# Altium PCB pin board.PcbDoc
Units mil, origin at the board's own origin, x right, y up, seen from the top; angles counter-clockwise.
Board outline 3464.57 x 2362.2 mil, 2 copper layers (Top Layer, Bottom Layer); 67 components, 66 nets, 298 pads, 102 vias.
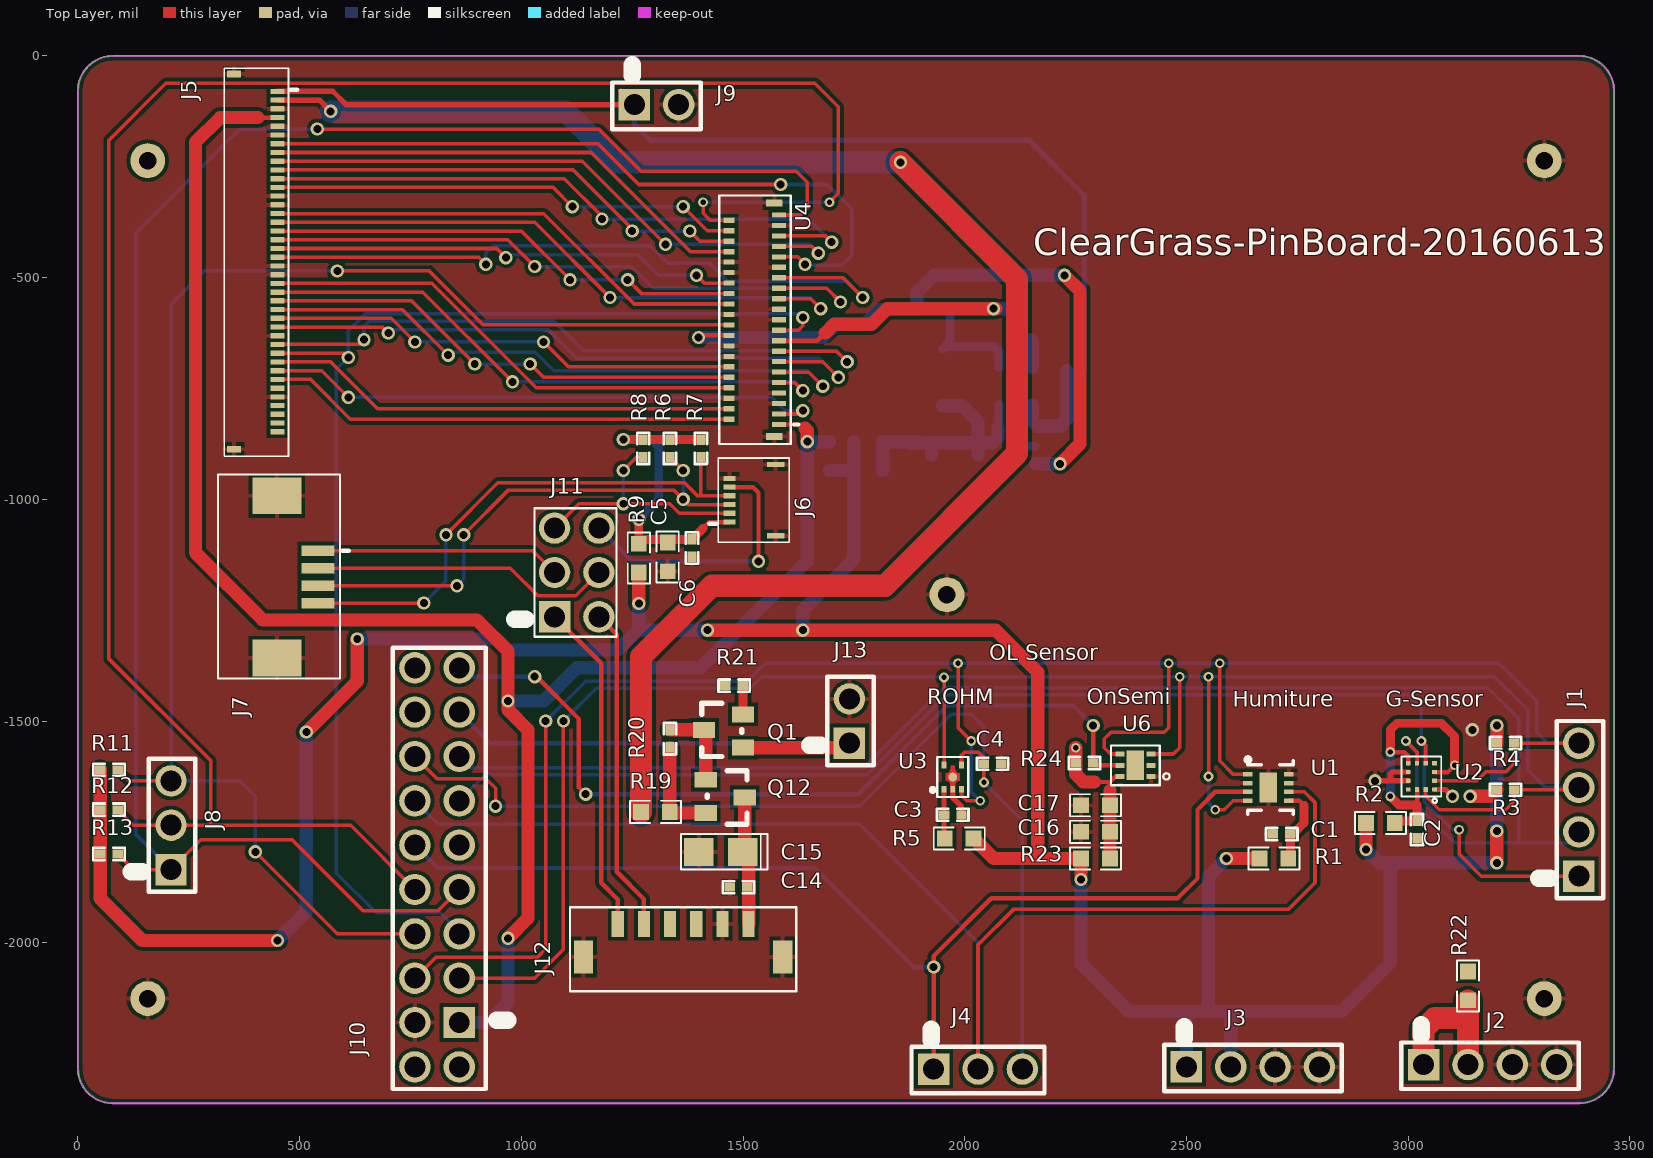
[diagram p0: Top Layer view]
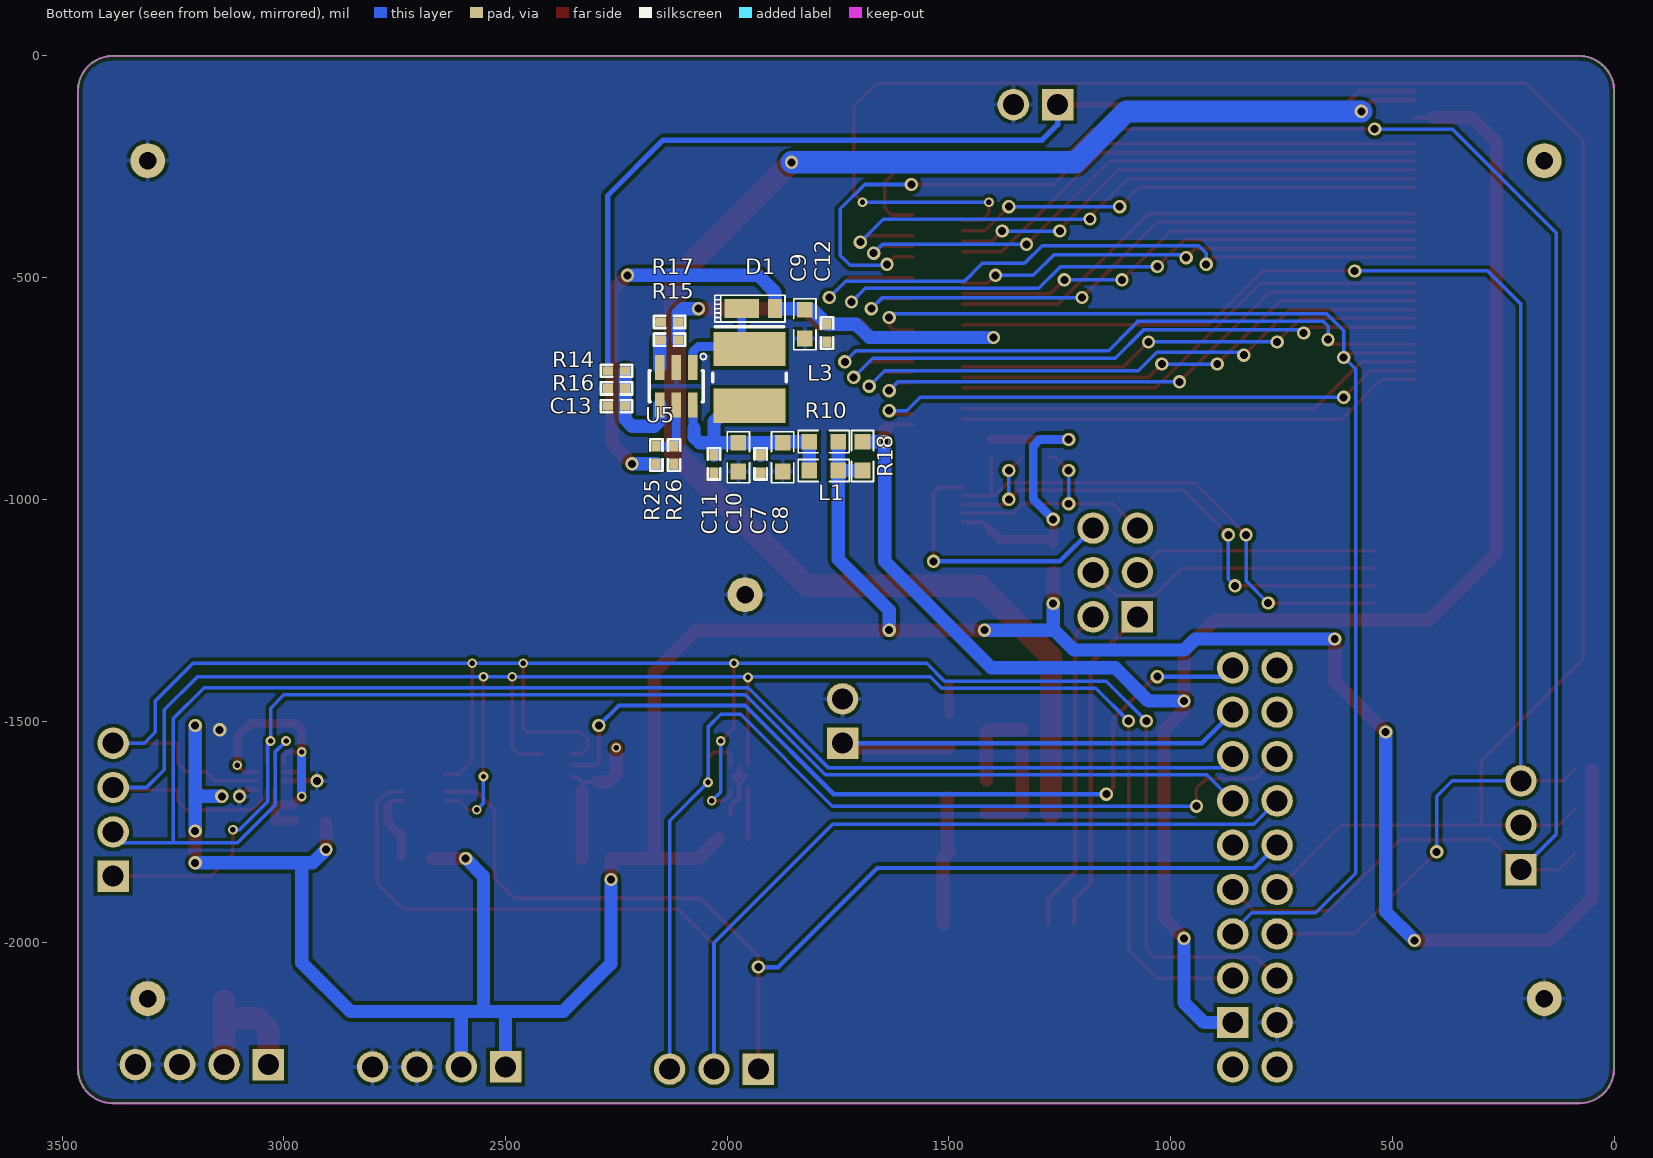
[diagram p1: Bottom Layer view, seen from below]
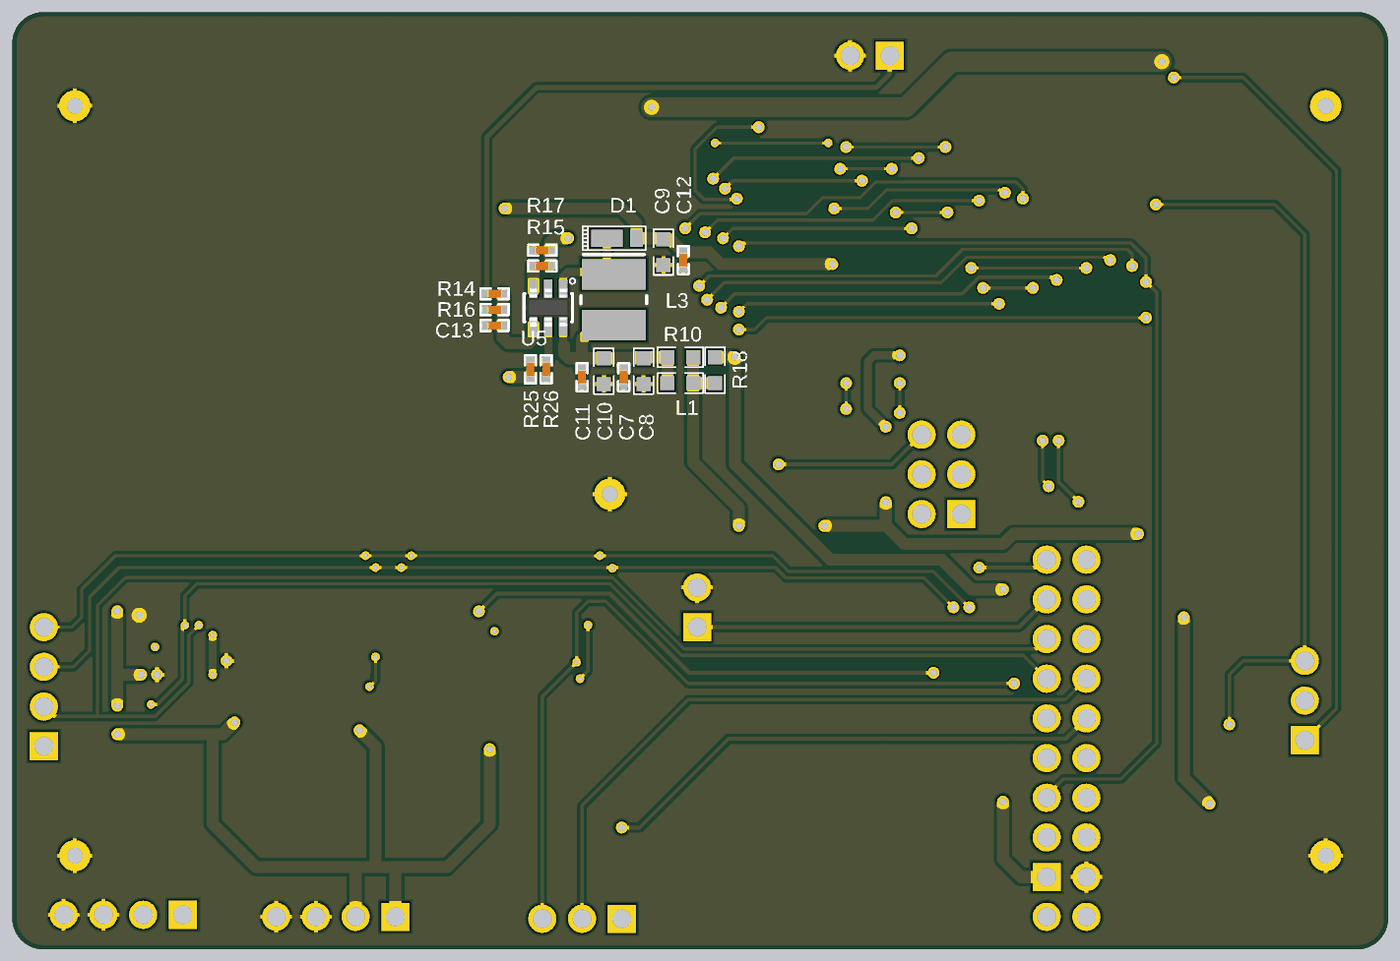
[diagram p2: 3D render of the assembled board from below, using the file's embedded part models]

## Layer stack, top to bottom
Top Layer: signal copper 1.4
Dielectric: dielectric 12.6, FR-4, Dk 4.8
Bottom Layer: signal copper 1.4

## Board outline
78.74,-2362.2 cw(c78.74,-2283.46) 0,-2283.46 0,-78.74 cw(c78.74,-78.74) 78.74,0 3385.83,0 cw(c3385.83,-78.74) 3464.57,-78.74 3464.57,-2283.46 cw(c3385.83,-2283.46) 3385.83,-2362.2

## Design rules (kind name [scope] priority, off if disabled: settings)
Clearance [All] p1: gap=8
PolygonConnect [All] p1: connectstyle=Relief reliefconductorwidth=10 reliefentries=4 polygonreliefangle="90 Angle"
RoutingVias [All] p1: holewidth=28 width=50 viastyle="Through Hole" minholewidth=28 minwidth=50 maxholewidth=28 maxwidth=50
SilkscreenOverComponentPads [IsPad] p1: minsilkscreentomaskgap=10
SolderMaskExpansion [All] p1: expansion=4
Width [All] p1: maxlimit=50 minlimit=8 preferedwidth=10 minimp=50.000000 maximp=50.000000 favimp=50.000000
27 further rules are at their usual default settings.

## Classes and differential pairs
component class Sensor: C1 C2 C3 C4 C14 C15 C16 C17 J1 J2 J3 J4 J12 J13 Q1 Q12 R1 R2 R3 R4 R5 R19 R20 R21 R22 R23 R24 U1 U2 U3 U6
component class LCD_RGB: C5 C6 C7 C8 C9 C10 C11 C12 C13 D1 J5 J6 J7 J8 J9 J11 L1 L3 R6 R7 R8 R9 R10 R11 R12 R13 R14 R15 R16 R17 R18 R25 R26 U4 U5

## Components (designator, comment, footprint, x,y, rotation, side; value= is the part's Value field where it differs from the comment)
C1 "0.1uF/10V" 0402C 2715,-1755 r180 top
C2 "4.7uF/10V" 0402C 3020,-1745 r270 top
C3 "0.1uF/10V" 0402C 1973.09,-1711.36 r0 top
C4 "0.1uF/10V" 0402C 2063.09,-1596.36 r0 top
C5 "10uF" 0603C 1330,-1130 r90 top
C6 "0.1uF/10V" 0402C 1385,-1110 r90 top
C7 "0.1uF/10V" 0402C 1925,-920 r270 bottom
C8 "10uF/10V" 0603C 1875,-905 r270 bottom
C9 "10uF/50V" 0603C 1825,-605 r270 bottom
C10 "10uF/10V" 0603C 1975,-905 r90 bottom
C11 "1nF/10V" 0402C 2030,-920 r90 bottom
C12 "0.1uF/10V" 0402C 1775,-625 r90 bottom
C13 "1uF/10V" 0402C 2250,-790 r180 bottom
C14 "0.1uF/10V" 0402C 1490,-1875 r180 top
C15 "22uF/6.3V" 3216 1450,-1795 r180 top
C16 "10uF/10V" 0603C 2295,-1750 r180 top
C17 "10uF/10V" 0603C 2295,-1690 r180 top
D1 "RTR040N03TL" TUMD2M 1930,-570 r90 bottom
J1 "Jumper" 2.54*4 3385,-1700 r90 top
J2 "CON_VCC" 2.54*4 3185,-2275 r0 top
J3 "CON_VCC" 2.54*4 2650,-2280 r0 top
J4 "CON_UART" 2.54*3 2030,-2285 r0 top
J5 "LCD" FPC_CON40-BACK-IRS 450,-80 r0 top
J6 "FH19C-6S-05SH" FPC_CON6-BACK-MOLEX 1521.5,-1002.05 r180 top
J7 "TP" FPC_CON4-1MM-MOLEX 495,-1175 r0 top
J8 "LCD/SPI" 2.54*3 210,-1735 r90 top
J9 "CON_LCD" 2.54*2 1305,-110 r0 top
J10 "Jumper*18" 2.54*18 810,-1830 r90 top
J11 "Jumper" "2.54*2 *3" 1075,-1265 r90 top
J12 "CI1506M1HR0-NH" WTB_SIDE_6PIN 1365,-1995 r180 top
J13 "CON_PM2.5" 2.54*2 1740,-1500 r90 top
L1 "BLM18AG601SN1" 0603R 1750,-935 r0 bottom
L3 "10uH-DCR<0.1R-1.5A/ELL4LG2R2NA" INDM4040X18N 1950,-725 r90 bottom
Q1 "RK7002BMT116" SOT23 1500,-1560 r90 top
Q12 "RRR030P03TL" TSMT3 1460,-1670 r270 top
R1 "0R/1%" 0603R 2665,-1810 r0 top
R2 "0R/1%" 0603R 2905,-1730 r0 top
R3 "4.7K/1%" 0402R 3220,-1655 r180 top
R4 "4.7K/1%" 0402R 3220,-1550 r180 top
R5 "0R/1%" 0603R 1955,-1765 r0 top
R6 "4.7K/5%" 0402R 1335,-885 r90 top
R7 "4.7K/5%" 0402R 1405,-885 r90 top
R8 "4.7K/1%" 0402R 1275,-885 r270 top
R9 "0R/1%" 0603R 1265,-1100 r270 top
R10 "0R/1%" 0603R 1815,-870 r180 bottom
R11 "10K/1%" 0402R 70,-1610 r0 top
R12 "10K/1%" 0402R 70,-1700 r0 top
R13 "10K/1%" 0402R 70,-1800 r0 top
R14 "47K/1%" 0402R 2250,-710 r180 bottom
R15 "2K2/1%" 0402R 2130,-640 r180 bottom
R16 "100K/1%" 0402R 2250,-750 r0 bottom
R17 "2R2/1%" 0402R 2130,-600 r0 bottom
R18 "0R/1%" 0603R 1695,-870 r270 bottom (schematic designator R9)
R19 "0R/1%" 0603R 1270,-1705 r0 top
R20 "549K" 0402R 1335,-1540 r90 top
R21 "10K" 0402R 1480,-1420 r0 top
R22 "0R/1%" 0603R 3135,-2065 r270 top
R23 "0R/1%" 0603R 2327.5,-1810 r180 top
R24 "4.7K/1%" 0402R 2270,-1595 r0 top
R25 "2K2/1%" 0402R 2160,-900 r270 bottom
R26 "2K2/1%" 0402R 2120,-900 r90 bottom
U1 "SHT31" DFN 2685,-1650 r270 top
U2 "DS_DA226" LGA-12 3030,-1625 r180 top
U3 "BH1721FVC-TR" WSOF5 1973.09,-1626.36 r90 top
U4 "LCD_RGB Interface" FPC_CON41-0.3MM-HRS 1525,-595 r90 top
U5 "AP3032" SOT23-6-L 2115,-745 r270 bottom
U6 "NOA1305-D" CUDFN6 2385,-1600 r90 top

## Footprints (in the part's own frame and the unit in brackets; to place one, negate y for a bottom-side part, rotate by r counter-clockwise, add the part's x,y. Pads: shape width x height; smd on the part's side, far side on the other; paste and mask are expansions set on the pad)
2.54*2 [mm]
  rect 1.8x1.8 hole 1.2: 1(-1.27,0)
  round 1.8 hole 1.2: 2(1.27,0)
  silkscreen extent -2.54,-1.4 2.54,2.29
"2.54*2 *3" [mm]
  rect 1.8x1.8 hole 1.2: 1(0,0)
  round 1.8 hole 1.2: 2(0,-2.54) 3(2.54,0) 4(2.54,-2.54) 5(5.08,0) 6(5.08,-2.54)
  silkscreen extent -1.14,-3.56 6.22,2.29
2.54*3 [mm]
  rect 1.8x1.8 hole 1.2: 1(-2.54,0)
  round 1.8 hole 1.2: 2(0,0) 3(2.54,0)
  silkscreen extent -3.81,-1.4 3.81,2.29
2.54*4 [mm]
  rect 1.8x1.8 hole 1.2: 1(-3.81,0)
  round 1.8 hole 1.2: 2(-1.27,0) 3(1.27,0) 4(3.81,0)
  silkscreen extent -5.08,-1.4 5.08,2.29
2.54*18 [mm]
  rect 1.8x1.8 hole 1.2: 1(-8.89,-1.27)
  round 1.8 hole 1.2: 2(-8.89,1.27) 3(-6.35,-1.27) 4(-6.35,1.27) 5(-3.81,-1.27) 6(-3.81,1.27) 7(-1.27,-1.27) 8(-1.27,1.27) 9(1.27,-1.27) 10(1.27,1.27) 11(3.81,-1.27) 12(3.81,1.27) 13(6.35,-1.27) 14(6.35,1.27) 15(8.89,-1.27) 16(8.89,1.27) 17(11.43,-1.27) 18(11.43,1.27) 19(-11.43,-1.27) 20(-11.43,1.27)
  silkscreen extent -12.7,-4.06 12.57,2.54
0402C [mm]
  rect 0.6x0.5 smd: 1(-0.5,0) 2(0.5,0)
  silkscreen extent -0.9,-0.35 0.9,0.35, body extent -0.51,-0.25 0.51,0.25, height 0.5
0402R [mm]
  rect 0.6x0.5 smd: 1(-0.5,0) 2(0.5,0)
  silkscreen extent -0.9,-0.35 0.9,0.35, body extent -0.51,-0.25 0.51,0.25, height 0.5
0603C [mm]
  rect 0.9x0.9 smd: 1(-0.826,0) 2(0.826,0)
  silkscreen extent -1.46,-0.64 1.46,0.64, body extent -1.38,-0.55 1.38,0.55, height 0.9
0603R [mm]
  rect 0.9x0.9 smd: 1(0,0) 2(1.651,0)
  silkscreen extent -0.64,-0.64 2.29,0.64, body extent -0.55,-0.55 2.2,0.55, height 0.5
3216 [mm]
  rect 1.7x1.6 smd: 1(-1.256,0) 2(1.256,0)
  silkscreen extent -2.67,-1.02 2.29,1.02, body extent -1.72,-0.85 1.72,0.85, height 1.8
CUDFN6 [mm]
  rect 0.28x0.52 smd: 1(-0.65,-0.89) 2(0,-0.89) 3(0.65,-0.89) 4(0.65,0.89) 5(0,0.89) 6(-0.65,0.89)
  rect 1.7x1 smd: 7(0,0)
  silkscreen extent -1.14,-1.96 1.14,1.4
DFN [mm]
  rect 0.25x0.55 smd: 1(-0.75,-1.175) 2(-0.25,-1.175) 3(0.25,-1.175) 4(0.75,-1.175) 5(0.75,1.175) 6(0.25,1.175) 7(-0.25,1.175) 8(-0.75,1.175)
  rect 1.7x1 smd: 9(0,0)
  silkscreen extent -1.72,-1.3 1.53,1.43, body extent -1.48,-1.55 1.51,1.55, height 1
FPC_CON4-1MM-MOLEX [mm] "厂家：Molex，Ð"
  rect 1.9x0.6 smd: 1(1.175,1.5) 2(1.175,0.5) 3(1.175,-0.5) 4(1.175,-1.5)
  rect 2.8x2.1 smd: 5(-1.175,4.65) 6(-1.175,-4.65)
  silkscreen extent -4.55,-5.82 2.95,5.87
FPC_CON6-BACK-MOLEX [mm] "厂家：M"
  rect 0.7x0.3 smd: 1(1.325,1.25) 2(1.325,0.75) 3(1.325,0.25) 4(1.325,-0.25) 5(1.325,-0.75) 6(1.325,-1.25)
  rect 1x0.3 smd: 7(-1.325,2.04) 8(-1.325,-2.04)
  silkscreen extent -2.1,-2.41 2.47,2.41, body extent -1.93,-2.29 1.78,2.29, height 1
FPC_CON40-BACK-IRS [mm]
  rect 0.8x0.3 smd: 1(0,0) 2(0,-0.5) 3(0,-1) 4(0,-1.5) 5(0,-2) 6(0,-2.5) 7(0,-3) 8(0,-3.5) 9(0,-4) 10(0,-4.5) 11(0,-5) 12(0,-5.5) 13(0,-6) 14(0,-6.5) 15(0,-7) 16(0,-7.5) 17(0,-8) 18(0,-8.5) 19(0,-9) 20(0,-9.5) 21(0,-10) 22(0,-10.5) 23(0,-11) 24(0,-11.5) 25(0,-12) 26(0,-12.5) 27(0,-13) 28(0,-13.5) 29(0,-14) 30(0,-14.5) 31(0,-15) 32(0,-15.5) 33(0,-16) 34(0,-16.5) 35(0,-17) 36(0,-17.5) 37(0,-18) 38(0,-18.5) 39(0,-19) 40(0,-19.5)
  rect 0.8x0.4 smd: 41(-2.5,1) 42(-2.5,-20.5)
  silkscreen extent -3.05,-20.9 1.14,1.33
FPC_CON41-0.3MM-HRS [mm] "厂家：H"
  rect 0.3x0.8 smd: 1(-6,-1.438) 3(-5.4,-1.438) 5(-4.8,-1.438) 7(-4.2,-1.438) 9(-3.6,-1.438) 11(-3,-1.438) 13(-2.4,-1.438) 15(-1.8,-1.438) 17(-1.2,-1.438) 19(-0.6,-1.438) 21(0,-1.438) 23(0.6,-1.438) 25(1.2,-1.438) 27(1.8,-1.438) 29(2.4,-1.438) 31(3,-1.438) 33(3.6,-1.438) 35(4.2,-1.438) 37(4.8,-1.438) 39(5.4,-1.438) 41(6,-1.438)
  rect 0.3x0.65 smd: 2(-5.7,1.438) 4(-5.1,1.438) 6(-4.5,1.438) 8(-3.9,1.438) 10(-3.3,1.438) 12(-2.7,1.438) 14(-2.1,1.438) 16(-1.5,1.438) 18(-0.9,1.438) 20(-0.3,1.438) 22(0.3,1.438) 24(0.9,1.438) 26(1.5,1.438) 28(2.1,1.438) 30(2.7,1.438) 32(3.3,1.438) 34(3.9,1.438) 36(4.5,1.438) 38(5.1,1.438) 40(5.7,1.438)
  rect 0.4x0.95 smd: 42(-6.7,-1.162) 43(6.7,-1.162)
  silkscreen extent -7.11,-2.54 7.11,2
INDM4040X18N [mm] "Molded Inductor, 2-Leads, Body 4.0x4.0mm, IPC Medium Density"
  rect 1.95x4.1 smd: 1(-1.625,0) 2(1.625,0)
  silkscreen extent -0.25,-2.1 2.9,2.1, body extent -2.1,-2.1 2.1,2.1, height 1.8
LGA-12 [mm]
  rect 0.275x0.25 smd: 1(-0.75,0.75) 2(-0.75,0.25) 3(-0.75,-0.25) 4(-0.75,-0.75) 7(0.75,-0.75) 8(0.75,-0.25) 9(0.75,0.25) 10(0.75,0.75)
  rect 0.25x0.275 smd: 5(-0.25,-0.75) 6(0.25,-0.75) 11(0.25,0.75) 12(-0.25,0.75)
  silkscreen extent -1.14,-1.14 1.14,1.52
SOT23 [mil]
  rect 36x50 smd: 1(75,0) 2(0,0) 3(40,88)
  silkscreen extent -20,3 100,93, body extent -22,-29 97,117, height 37
SOT23-6-L [mm]
  rect 1.45x0.55 smd: 1(-1.075,0.95) 2(-1.075,0) 3(-1.075,-0.95) 4(1.075,-0.95) 5(1.075,0) 6(1.075,0.95)
  silkscreen extent -1.88,-1.55 0.9,1.72, body extent -1.23,-1.4 1.19,1.4, height 1.08
TSMT3 [mil]
  rect 36x50 smd: 1(-37.5,-44) 2(37.5,-44) 3(2.5,44)
  silkscreen extent -58,-41 62,49, body extent -60,-73 60,73, height 39
TUMD2M [mm] "厂家£"
  rect 1.1x2 smd: 1(0,0.95)
  rect 1.1x0.8 smd: 2(0,-0.95)
  silkscreen extent -0.76,-1.52 0.76,2.49
WSOF5 [mm]
  rect 0.4x0.28 smd: 1(-0.7,0.5) 2(-0.7,0) 3(-0.7,-0.5) 4(0.7,-0.5) 5(0.7,0.5)
  round 0.5 smd: 2(0,0)
  Top Layer region: -0.455,0.15 -0.33,0.183 -0.238,0.275 -0.205,0.4 -0.205,0.4 0.205,0.4 0.205,0.4 0.238,0.275 0.33,0.183 0.455,0.15 0.455,0.15 0.455,0.11 0.65,0.11 0.65,-0.11 0.455,-0.11 0.455,-0.15 0.33,-0.183 0.238,-0.275 0.205,-0.4 0.205,-0.4 -0.205,-0.4 -0.238,-0.275 -0.33,-0.183 -0.455,-0.15 -0.455,-0.15 -0.455,-0.11 -0.85,-0.11 -0.85,0.11 -0.455,0.11
  silkscreen extent -1.14,-0.89 1.14,1.25, body extent -1,-0.74 1,0.74, height 0.6
WTB_SIDE_6PIN [mm]
  rect 0.7x1.5 smd: 1(-3.75,-0.953) 2(-2.25,-0.953) 3(-0.75,-0.953) 4(0.75,-0.952) 5(2.25,-0.952) 6(3.75,-0.952)
  rect 1.1x1.9 smd: 7(-5.7,0.952) 8(5.7,0.953)
  silkscreen extent -6.48,-1.91 6.48,2.9

## Part data
C1 C2 C5: library part CAP, "厂家：Murata，型号："
C3 C4 C9 C12 C14 C16 C17: library part CAP, "厂家：Mur"
C6 C10 C11 C13: library part CAP, "Capacitor"
C7: library part Cap, "Capacitor"
C8: library part "Cap Pol1", "Polarized Capacitor (Radial)"
C15: library part Cap, "厂家：ROHM，型"
D1: library part "D Schottky", "Schottky Diode"
J1: library part Jumper*4
J5: library part FPC60_1
J6: "ZIF connector placed bottom side"
J7: library part Jumper_uart, "Jumper"
J8: library part Jumper, "Jumper"
J11: library part Jumper_uart
J12: library part CI15, "厂家：瀚荃股份，型号：CI15"
L1: library part CHOKE, "厂家：MURATA，Ð"
L3: library part Inductor, "Inductor"
Q1: library part RK7002, "厂家：ROHM，"
Q12: library part PMOS, "厂家：ROHM，"
R1 R2 R3 R4 R5 R23 R24: library part RES1, "厂家：Yageo，型º"
R6 R7 R8 R11 R12 R13: library part Res1, "厂家：Ya"
R9 R10 R18 R19 R22: library part RES1, "厂家：Yageo，型"
R14 R15 R16 R17 R25 R26: library part Res1, "Resistor"
R20 R21: library part RES1
U1: "厂家："
U2: library part LI, "厂家：ST"

## Free pads (board coordinates)
  round 78.74 hole 39.37: 0(157.48,-2125.98) 0(157.48,-236.22) 0(1960,-1215) 0(3307.09,-2125.98) 0(3307.09,-236.22)

## Via types
v1: diameter 30, hole 18, Top Layer to Bottom Layer, 82 vias
v2: diameter 22, hole 12, Top Layer to Bottom Layer, 20 vias

## Nets (pads, with @x,y where several pads share a name; then routed paths per layer and width w, separated by ;. In a path a pad name is that pad's centre, name@x,y a point inside that pad or via, vN(x,y) a via of type N, cw(c..) or ccw(c..) an arc to the next point about the centre after c; other vN are vias at no path point)
+3.3V: J3.1 J3.2 L1.1 R1.1 R2.1 R3.2 R4.2 R5.2 R9.2 R10.2 R11.1 R12.1 R13.1 R18.2 R23.2 | length 7183.5
  Top Layer w30: R11.1 R12.1 R13.1 50.32,-1900.32 145,-1995 v1(450,-1995) ; v1(515,-1525) 630,-1410 v1(630,-1315) ; v1(1265,-1235) R9.2 ; v1(1420,-1295) v1(1635,-1295) 2070,-1295 2165,-1390 2165,-1810 ; R5.2 2065,-1810 2165,-1810 ; v1(2262.5,-1857.5) R23.2 2165,-1810 ; v1(2590,-1810) R1.1 ; v1(2905,-1790) R2.1 ; v1(3140,-1670) 3185.31,-1670 R3.2 ; v1(3200,-1820) v1(3200,-1748) ; R4.2@3200,-1549.69 R4.2 v1@3200.31,-1510.31
  Bottom Layer w30: v1(450,-1995) 515,-1930 v1(515,-1525) ; v1(630,-1315) 945,-1315 970,-1340 1218,-1340 1265,-1293 v1(1265,-1235) ; 1267,-1295 v1(1420,-1295) ; v1(1635,-1295) 1635,-1250 1750,-1135 L1.1 ; R18.2 L1.1 ; R10.2 L1.1 ; v1(2262.5,-1857.5) 2262.5,-2047.5 2370,-2155 2500,-2155 ; J3.1 2500,-2155 ; 2550,-2140 2550,-1850 v1(2590,-1810) ; J3.2 2600,-2155 ; v1(2905,-1790) 2935,-1820 v1(3200,-1820) ; 2960,-1825 2960,-2045 2850,-2155 2600,-2155 ; v1(3140,-1670) 3200,-1670 ; v1(3200,-1748) 3200,-1670 ; v1(3200,-1510) 3200,-1670 ; 2500,-2155 2600,-2155
ALERT: J4.1 J10.10 U1.3 | length 2491.8
  Top Layer w10: J4.1 v1(1930,-2055) 1930,-2030 2060,-1900 2480,-1900 2525,-1855 2525,-1700 2565.16,-1659.84 U1.3
  Bottom Layer w10: J10.10 811.57,-1831.57 1661.57,-1831.57 1885,-2055 v1(1930,-2055)
B_5V: J2.1 J2.2 R22.2 | length 335.4
  Top Layer w50: J2.1 3035,-2195 3060,-2170 3135,-2170 ; J2.2 3135,-2170 ; R22.2 3135,-2170
BLVDD: C7.1 C8.1 C10.2 C11.2 L1.2 L3.1 R10.1 U5.6 | length 645.2
  Bottom Layer w20: 2075,-860 2077.6,-857.4 U5.6
  Bottom Layer w30: L1.2 R10.1 1894.68,-870 1897.18,-872.5 ; C8.1 1897.18,-872.5 ; C7.1 1925,-872.5 ; L3.1 1993.98,-788.98 2030,-825 2030,-872.5 ; C11.2 2030,-872.5 ; 2075,-840 2075,-860 2062.5,-872.5 2030,-872.5 ; 1897.18,-872.5 C10.2 2030,-872.5
G-INT1: J1.1 J10.11 U2.5 | length 2999.7
  Top Layer w8: v2(3030,-1545) 3039.84,-1554.84 U2.5 ; v2(3115,-1745) 3115,-1800 3165,-1850 J1.1
  Bottom Layer w8: J10.11 919,-1621 1779.46,-1621 1959.46,-1441 3000,-1441 3030,-1471 v2(3030,-1545) 3036,-1551 3036,-1681 3100,-1745 v2(3115,-1745)
G-INT2: J1.2 J10.13 U2.6 | length 3410.7
  Top Layer w8: v2(2995,-1545) 3020.16,-1570.16 U2.6
  Bottom Layer w8: J10.13 885,-1605 1772.84,-1605 1952.84,-1425 3105,-1425 3180,-1425 3250,-1495 3250,-1775 ; v2(2995,-1545) 3020,-1570 3020,-1690 3105,-1775 3250,-1775 ; J1.2 3360,-1775 3250,-1775
G-VDD: C2.1 R2.2 U2.3 U2.7 U2.11 | length 675.1
  Top Layer w10: v2(2960,-1570) 2991,-1570 3000.47,-1579.47 U2.7 ; 3020.16,-1689.84 U2.11 ; U2.3 3089.84,-1615.16 v2(3105,-1600)
  Top Layer w20: v2(2960,-1670) 2979.84,-1689.84 3020.16,-1689.84 ; v2(2960,-1570) 2960,-1520 2975,-1505 3075,-1505 3105,-1535 v2(3105,-1600) ; R2.2@2974.69,-1725.32 C2.1 3020,-1690
  Bottom Layer w20: v2(2960,-1670) v2(2960,-1570)
GND: C1.2 C2.2 C3.2 C4.2 C5.1 C6.1 C7.2 C8.2 C9.2 C10.1 C11.1 C12.1 C13.1 C14.2 C15.2 C16.2 C17.2 J2.3 J2.4 J3.3 J3.4 J5.3 J5.5 J5.6 J5.13 J5.14 J5.21 J5.22 J5.29 J5.36 J5.41 J5.42 J6.6 J6.7 J6.8 J7.5 J7.6 J9.2 J10.2 J12.2 J12.7 J12.8 J13.2 pad.0@157.48,-2125.98 pad.0@1960,-1215 pad.0@3307.09,-236.22 pad.0@3307.09,-2125.98 R16.2 R17.2 R21.1 R26.1 U1.2 U1.7 U1.8 U1.9 U2.1 U2.8 U2.9 U3.2 U4.5 U4.6 U4.7 U4.14 U4.16 U4.21 U4.22 U4.23 U4.30 U4.31 U4.32 U4.39 U4.42 U4.43 U5.2 U6.1 | length 272.3
  Top Layer w12: 1973.09,-1673.55 1973.09,-1653.92 U3.2@1973.09,-1626.36 ; 1973.41,-1673.86 1992.78,-1693.23 C3.2 ; v1(2925.16,-1634.84) 2960,-1634.84 ; U2.9 2960,-1634.84 ; U2.8 2964.84,-1615.16 2960,-1620 2960,-1634.84 ; U2.1 3084.53,-1654.53 v1(3100,-1670)
  other v1: 3145,-1520
LCD_B2: J5.23 U4.8 | length 1115.9
  Top Layer w8: J5.23 798.07,-513.07 1033.54,-748.54 U4.8
LCD_B3: J5.24 U4.9 | length 1338
  Top Layer w8: J5.24 777.76,-532.76 v1(980,-735) ; U4.9 1616.73,-736.73 v1(1635,-755)
  Bottom Layer w8: v1(980,-735) 1615,-735 v1(1635,-755)
LCD_B4: J5.25 U4.10 | length 1089.8
  Top Layer w8: J5.25 752.44,-552.44 v1(895,-695) ; v1(1020,-695) 1049.92,-724.92 U4.10
  Bottom Layer w8: v1(895,-695) v1(1020,-695)
LCD_B5: J5.26 U4.11 | length 1419
  Top Layer w8: J5.26 732.13,-572.13 v1(835,-675) ; U4.11 1648.11,-713.11 v1(1680,-745)
  Bottom Layer w8: v1(835,-675) 842,-668 1031.18,-668 1073.18,-710 1645,-710 v1(1680,-745)
LCD_B6: J5.27 U4.12 | length 1063.8
  Top Layer w8: J5.27 706.81,-591.81 v1(760,-645) ; v1(1050,-645) 1106.3,-701.3 U4.12
  Bottom Layer w8: v1(760,-645) v1(1050,-645)
LCD_B7: J5.28 U4.13 | length 1465.9
  Top Layer w8: J5.28 686.5,-611.5 v1(700,-625) ; U4.13 1679.49,-689.49 v1(1715,-725)
  Bottom Layer w8: v1(700,-625) 707,-618 1061.18,-618 1125,-681.82 1671.82,-681.82 v1(1715,-725)
LCD_BL_EN: J5.1 J9.1 R14.1 | length 2381.1
  Top Layer w12: J5.1@450,-79.69 574.68,-79.69 605,-110 J9.1 J9.1@1225,-80
  Bottom Layer w12: J9.1 1255,-155 1290,-190 2145,-190 2269.68,-314.69 R14.1
LCD_DE: J5.34 U4.2 | length 1055.6
  Top Layer w8: J5.34 524.61,-729.61 614.41,-819.41 U4.2
LCD_G2: J5.15 U4.24 | length 1102.9
  Top Layer w8: J5.15 1050.59,-355.59 1254.57,-559.57 U4.24
LCD_G3: J5.16 U4.25 | length 1408.3
  Top Layer w8: J5.16 1030.28,-375.28 v1(1200,-545) ; U4.25 1652.76,-547.76 v1(1675,-570)
  Bottom Layer w8: v1(1200,-545) 1650,-545 v1(1675,-570)
LCD_G4: J5.17 U4.26 | length 1076.8
  Top Layer w8: J5.17 1000,-394.96 v1(1110.04,-505) ; v1(1240,-505) 1270.94,-535.94 U4.26
  Bottom Layer w8: v1(1110.04,-505) v1(1240,-505)
LCD_G5: J5.18 U4.27 | length 1479.3
  Top Layer w8: J5.18 969.65,-414.65 v1(1030,-475) ; U4.27 1689.13,-524.13 v1(1720,-555)
  Bottom Layer w8: v1(1030,-475) 1248.18,-475 1297.28,-524.09 1689.09,-524.09 v1(1720,-555)
LCD_G6: J5.19 U4.28 | length 1056.5
  Top Layer w8: J5.19 944.33,-434.33 v1(965,-455) ; v1(1395,-495) 1412.32,-512.32 U4.28
  Bottom Layer w8: v1(965,-455) 972,-448 1263,-448 1310,-495 v1(1395,-495)
LCD_G7: J5.20 U4.29 | length 1614
  Top Layer w8: J5.20 904.02,-454.02 v1(920,-470) ; U4.29 1725.51,-500.51 v1(1770,-545)
  Bottom Layer w8: v1(920,-470) 920,-445 937,-428 1289.82,-428 1329.82,-468 1424.91,-468 1465,-508.09 1733.09,-508.09 v1(1770,-545)
LCD_HS: J5.32 U4.4 | length 1062.1
  Top Layer w8: J5.32 570.24,-690.24 675.79,-795.79 U4.4
LCD_PCLK: J5.30 U4.15 | length 1526
  Top Layer w8: J5.30 450.87,-650 635,-650 v1(645,-640) ; U4.15 1710.87,-665.87 v1(1735,-690)
  Bottom Layer w8: v1(645,-640) 645,-610 657,-598 1073,-598 1089.5,-614.5 1140,-665 1710,-665 v1(1735,-690)
LCD_R2: J5.7 U4.33 | length 1641.1
  Top Layer w8: J5.7 1173.11,-198.11 1265,-290 v1(1585,-290) ; U4.33 1623.27,-453.27 v1(1640,-470)
  Bottom Layer w8: v1(1585,-290) 1690,-290 1745,-345 1745,-450 1723,-472 1642,-472 v1(1640,-470)
LCD_R3: J5.8 U4.34 | length 1111
  Top Layer w8: J5.8 1157.8,-217.8 1381.46,-441.46 U4.34
LCD_R4: J5.9 U4.35 | length 1400.7
  Top Layer w8: J5.9 1137.48,-237.48 v1(1325,-425) ; U4.35 1654.65,-429.65 v1(1670,-445)
  Bottom Layer w8: v1(1325,-425) 1650,-425 v1(1670,-445)
LCD_R5: J5.10 U4.36 | length 1090
  Top Layer w8: J5.10 1117.17,-257.17 v1@1255,-395 ; v1(1380,-395) 1402.83,-417.83 U4.36
  Bottom Layer w8: v1(1250,-395) v1(1380,-395)
LCD_R6: J5.11 U4.37 | length 1437
  Top Layer w8: J5.11 1096.85,-276.85 1182,-362 v1(1182,-368) ; U4.37 1686.02,-406.02 v1(1700,-420)
  Bottom Layer w8: v1(1182,-368) 1648,-368 v1(1700,-420)
LCD_R7: J5.12 U4.38 | length 1058.9
  Top Layer w8: J5.12 1071.54,-296.54 v1(1115,-340) ; v1(1365,-340) 1419.21,-394.21 U4.38
  Bottom Layer w8: v1(1115,-340) v1(1365,-340)
LCD_RESET: J5.31 J10.5 U4.19 | length 2855
  Top Layer w8: J5.31 600.55,-670.55 v1(610,-680) ; U4.19 1625,-618.62 1635,-608.62 v1(1635,-590)
  Bottom Layer w8: J10.5 860,-1975 817.57,-1932.57 672.57,-1932.57 583,-1843 583,-707 v1(610,-680) 610,-620 648,-582 1627,-582 v1(1635,-590)
LCD_SPI1_CLK: J8.2 J10.8 R12.2 U4.40 | length 4703.5
  Top Layer w8: R12.2 124.69,-1735 J8.2 300,-1735 ; J10.8 615,-1735 300,-1735 ; v2(1410,-330) 1410,-355 1425.59,-370.59 U4.40 ; v2(1695,-330) 1715,-310 1715,-115 1661.68,-61.69 198.32,-61.69 70,-190 70,-1360 300,-1590 300,-1735
  Bottom Layer w8: v2(1410,-330) v2(1695,-330)
LCD_SPI1_CS: J8.1 J10.7 R13.2 U4.41 | length 4160.3
  Top Layer w8: R13.2 124.69,-1835 J8.1 277,-1768 483,-1768 642.43,-1927.43 812.57,-1927.43 J10.7 ; v1(540,-165) 1175,-165 1270,-260 1620,-260 1645,-285 1645,-343.78 1630,-358.78 U4.41
  Bottom Layer w8: J8.1@212.43,-1832.57 J8.1 130,-1755 130,-400 365,-165 v1(540,-165)
LCD_SPI1_MOSI: J8.3 J10.6 R11.2 U4.20 | length 3311.7
  Top Layer w8: R11.2 114.69,-1635 J8.3 ; v1(400,-1795) 585,-1980 J10.6 ; v1(585,-485) 792.63,-485 914.44,-606.81 U4.20
  Bottom Layer w8: v1(400,-1795) 400,-1670 365,-1635 J8.3 210,-560 285,-485 v1(585,-485)
LCD_VS: J5.33 U4.3 | length 1278.9
  Top Layer w8: J5.33 549.92,-709.92 v1(610,-770) ; U4.3 1627.4,-807.6 v1(1635,-800)
  Bottom Layer w8: v1(610,-770) 1565,-770 1595,-800 v1(1635,-800)
LED+: C9.1 C12.2 D1.2 R25.2 U4.18 | length 1490.5
  Top Layer w10: v1@1400,-640 1409.57,-630.43 U4.18
  Top Layer w30: v1(2215,-920) 2260,-875 2260,-530 v1(2225,-495)
  Bottom Layer w12: C9.1 C9.1@1827.5,-570
  Bottom Layer w30: v1(1399.78,-635.22) 1400,-635 1680,-635 1709.69,-605.31 C12.2 1807.82,-572.5 C9.1 ; C9.1@1827.5,-570 D1.2 1892.6,-532.4 1930,-495 v1(2225,-495) ; R25.2 v1@2214.69,-919.69
LED-: R15.2 R17.1 U4.17 | length 627.6
  Top Layer w10: U4.17 1667.76,-642.24 1685,-625
  Top Layer w30: 1685,-625 1705,-605 1790,-605 1825,-570 v1(2065,-570) v1@2070,-570
  Bottom Layer w30: v1(2065,-570) 2100,-570 2110.31,-580.31 R15.2
NetC1_1: C1.1 R1.2 U1.5 | length 169.1
  Top Layer w10: U1.5 2754.53,-1679.53 2765,-1690
  Top Layer w20: R1.2@2734.69,-1805.32 C1.1 2740,-1755 2765,-1730 2765,-1690
NetC13_2: C13.2 R14.2 R16.1 U5.4 | length 234.2
  Bottom Layer w30: U5.4 2152.4,-822.4 2165,-835 2215,-835 2230.31,-819.69 C13.2 R14.2
NetD1_1: D1.1 L3.2 U5.1 | length 260.1
  Bottom Layer w20: L3.2 L3.2@1956.02,-655 ; D1.1 1967.4,-643.62 L3.2@1956.02,-655 ; U5.1 2077.6,-667.6 2065,-655 L3.2@1956.02,-655
NetQ1_1: Q1.1 R21.2 | length 65.1
  Top Layer w20: R21.2 1499.69,-1484.69 Q1.1
NetQ1_3: Q1.3 Q12.1 R20.2 | length 185.2
  Top Layer w30: R20.2@1335.31,-1520 Q1.3 ; Q12.1 Q1.3@1416,-1524
NetQ12_2: Q12.2 R19.2 R20.1 | length 223.8
  Top Layer w30: R19.2 R20.1 ; R19.2@1337.5,-1707.5 Q12.2
NetR15_1: R15.1 U5.3 | length 63.8
  Bottom Layer w30: R15.1 2152.4,-642.72 U5.3
NetR25_1: R25.1 R26.2 U5.5 | length 135.1
  Bottom Layer w20: U5.5 2115,-875.32 R26.2 R25.1
NRESET: J4.2 J10.12 U1.6 | length 3035.4
  Top Layer w8: J4.2 2030,-2005 2110,-1925 2730,-1925 2790,-1865 2790,-1683.89 2765.96,-1659.84 U1.6
  Bottom Layer w8: J10.12 812.57,-1732.57 1762.57,-1732.57 2030,-2000 J4.2
OL_INT: J10.17 R24.2 U6.5 | length 1846.6
  Top Layer w10: v1(1030,-1400) 1034.6,-1400 1130,-1495.4 1130,-1650 v1(1145,-1665) ; R24.2 v1(2289.69,-1510.31) ; R24.2@2294.69,-1600 U6.5
  Bottom Layer w10: J10.17@880,-1400 v1(1030,-1400) ; v1@1150,-1665 1760,-1665 1960,-1465 2244.37,-1465 v1(2289.69,-1510.31)
OL_RESET: C4.1 J4.3 J10.14 U3.4 | length 2394
  Top Layer w8: J10.14 810,-1630 920,-1630 942,-1652 v1(942,-1692) ; U3.4 1992.78,-1577.22 2000,-1570 2030,-1570 2043.41,-1583.41 C4.1 v2(2043.41,-1638.41)
  Bottom Layer w8: v1(942,-1692) 1763,-1692 1970,-1485 2015,-1485 2043.41,-1513.41 v2(2043.41,-1638.41) 2130,-1725 J4.3
OL_VCC: C3.1 R5.1 U3.1 | length 111.7
  Top Layer w12: U3.1 1953.41,-1763.41 R5.1
OL_VCC2: C16.1 C17.1 R23.1 R24.1 U6.6 | length 344.2
  Top Layer w10: 2292.5,-1637.5 2327.5,-1637.5 ; 2327.5,-1657.5 2327.5,-1637.5 ; U6.6 2339.41,-1625.59 2327.5,-1637.5
  Top Layer w30: v2(2250.32,-1560.32) R24.1 2250.32,-1620.32 2267.5,-1637.5 2292.5,-1637.5 ; R23.1 C16.1 C17.1 2327.5,-1657.5
P_RX_UART1: J11.2 J12.5 | length 734.5
  Top Layer w10: J11.2 1215,-1305 1215,-1840 1276.42,-1901.42 J12.5
P_TX_UART1: J11.1 J12.6 | length 751.5
  Top Layer w10: J11.1 1180,-1370 1180,-1865 1217.36,-1902.36 J12.6
PM2.5_CONTROL: J10.15 J13.1 Q1.2 | length 1139
  Top Layer w30: Q1.2 J13.1@1730,-1560
  Bottom Layer w10: J10.15 930,-1550 J13.1
PM2.5_VCC: C14.1 C15.1 J12.1 Q12.3 | length 285.9
  Top Layer w30: C15.1 1512.64,-1808.19 J12.1 ; C15.1@1504,-1790.45 Q12.3
T_SCL: J1.3 J10.3 R3.1 U1.4 U2.12 U3.5 U6.3 | length 4509
  Top Layer w8: J10.3 1030,-2080 1095,-2015 v1(1095,-1500) ; U3.5 v2(1953.41,-1401.59) ; U6.3 2470.59,-1574.41 2485,-1560 v2(2485,-1400) ; v2(2550,-1625) v2(2550,-1400) ; v2(2565,-1700) 2585,-1700 2605.47,-1679.53 U1.4 ; U2.12 3039.84,-1669.84 3070,-1700 3220,-1700 3239.69,-1680.32 R3.1 J1.3@3380,-1655
  Bottom Layer w8: v1(1095,-1500) 1169,-1426 1516.63,-1426 1542.63,-1400 v2(2485,-1400) v2(2550,-1400) 3195,-1400 3270,-1475 3270,-1610 3310,-1650 J1.3 ; v2(2550,-1625) 2550,-1685 v2(2565,-1700)
T_SDA: J1.4 J10.4 R4.1 U1.1 U2.2 U3.3 U6.4 | length 4772.4
  Top Layer w8: J10.4 807.43,-2032.57 1036.43,-2032.57 1055,-2014 v1(1055,-1500) ; v2(1985,-1370) 1985,-1515 v2(2015,-1545) ; U3.3 1992.78,-1667.78 2005,-1680 v2(2035,-1680) ; U6.4 2329.41,-1574.41 2315,-1560 2315,-1540 2330,-1525 2450,-1525 2460,-1515 v2(2460,-1370) ; v2(2575,-1370) 2575,-1590 2605.47,-1620.47 U1.1 ; U2.2 3154.84,-1634.84 3174.84,-1614.84 3220.16,-1614.84 3239.69,-1595.32 R4.1 J1.4
  Bottom Layer w8: v1(1055,-1500) 1145,-1410 1510,-1410 1550,-1370 v2(1985,-1370) v2(2460,-1370) v2(2575,-1370) 3205,-1370 3290,-1455 3290,-1525 3315,-1550 J1.4 ; v2(2015,-1545) 2015,-1660 v2(2035,-1680)
TP_I2C_SCK: J6.3 J7.3 R6.1 | length 1196.3
  Top Layer w8: J7.3 v1@855,-1194.68 ; v1(870,-1080) 970,-980 1345,-980 v1(1365,-1000) 1376.89,-1011.89 J6.3 ; R6.1@1335,-905 v1(1365,-935)
  Bottom Layer w8: v1(855,-1195) 870,-1180 v1(870,-1080) ; v1(1365,-1000) v1(1365,-935)
TP_I2C_SDA: J6.4 J7.4 R7.1 | length 1200.9
  Top Layer w8: J7.4 v1(780,-1234.05) ; v1(830,-1080) 947,-963 1368,-963 1397.2,-992.2 J6.4 ; 1405,-992.2 R7.1
  Bottom Layer w8: v1(780,-1234.05) 830,-1184.05 v1(830,-1080)
TP_INT: J7.1 J11.3 | length 554.1
  Top Layer w8: J7.1 1025.94,-1115.94 J11.3
TP_INT': J6.2 J11.5 R8.2 | length 558.6
  Top Layer w8: J11.5 1130,-1010 v1(1230,-1010) 1335,-1010 1356.57,-1031.57 J6.2 ; v1(1230,-935) 1260.31,-904.69 R8.2
  Bottom Layer w8: v1(1230,-1010) v1(1230,-935)
TP_RESET: J7.2 J11.4 | length 681.3
  Top Layer w8: J7.2 975.31,-1155.31 1037.57,-1217.57 1122.43,-1217.57 J11.4
TP_RESET': J6.5 J11.6 | length 616.9
  Top Layer w10: J6.5 1522.52,-972.52 1535,-985 v1(1535,-1140)
  Bottom Layer w10: J11.6 1250,-1140 v1(1535,-1140)
TP_VCC: C5.2 C6.2 J6.1 R6.2 R7.2 R8.1 R9.1 | length 700.4
  Top Layer w10: 1410,-1065.31 1424.05,-1051.26 J6.1
  Top Layer w20: v1@1230.32,-865.32 R8.1 R7.2 ; R9.1 v1@1265,-1055 ; R9.1@1274.69,-1090.31 C6.2 1410,-1065.31
  Bottom Layer w20: v1(1230,-865) 1295,-865 1310,-880 1310,-1000 v1(1265,-1045)
VCC: J5.4 J10.1 R18.1 U4.1 | length 4105.8
  Top Layer w10: 405.94,-139.06 J5.4 ; U4.1 1631.22,-831.22 1640,-840
  Top Layer w30: 405.94,-139.06 320.94,-139.06 265,-195 265,-1120 417.06,-1272.05 900,-1272.05 968,-1340.05 ; v1(970,-1990) 1015,-1945 1015,-1520 970,-1475 v1(970,-1455) 970,-1342.05 ; 1640,-840 1645,-845 v1(1645,-870)
  Bottom Layer w30: J10.1 925,-2180 970,-2135 v1(970,-1990) ; v1(970,-1455) 1050,-1455 1125,-1380 1405,-1380 1645,-1140 v1(1645,-870) R18.1
VCC-5V: J5.2 R19.1 | length 3616.8
  Top Layer w12: J5.2 544.68,-99.69 v1(570,-125)
  Top Layer w50: R19.1 1270,-1355 1430,-1195 1820,-1195 2118,-897 2118,-503 v1(1855,-240)
  Bottom Layer w50: v1(570,-125) 1100,-125 1215,-240 v1(1855,-240)
VCC_5V: R22.1
pads on no net: J5.35 J5.37 J5.38 J5.39 J5.40 J10.9 J10.16 J10.18 J10.19 J10.20 J12.3 J12.4 U2.4 U2.10 U6.2 U6.7

## Polygon pours and split planes (outlines as drawn)
GND on Top Layer "Bottom Layer-No Net" (solid, remove dead copper, pour order 2): -295,220 -280,235 3840,235 3840,-2500 3735,-2605 3625,-2715 -390,-2715
GND on Bottom Layer "Bottom Layer-No Net" (solid, remove dead copper, pour order 4): -295,50 3735,50 3780,95 3860,15 3860,-2575 -45,-2575 -280,-2810

## Keep-outs
Keep-Out Layer:
  the board outline again, w5

## Silkscreen, mask and mechanical layers (free items; w line width, h text height)
Top Overlay:
  text "ClearGrass-PinBoard-20160613" at 2155,-450 h60
  text "OL Sensor" at 2055,-1375 h60
  text "ROHM" at 1915,-1475 h60
  text "OnSemi" at 2275,-1475 h60
  text "Humiture" at 2605,-1480 h60
  text "G-Sensor" at 2950,-1480 h60